# Altium PCB PCB1.PcbDoc
Units mm, origin at the board's own origin, x right, y up, seen from the top; angles counter-clockwise.
Board outline 55.12 x 28 mm, 2 copper layers (Top Layer, Bottom Layer); 10 components, 22 nets, 64 pads, 18 vias.
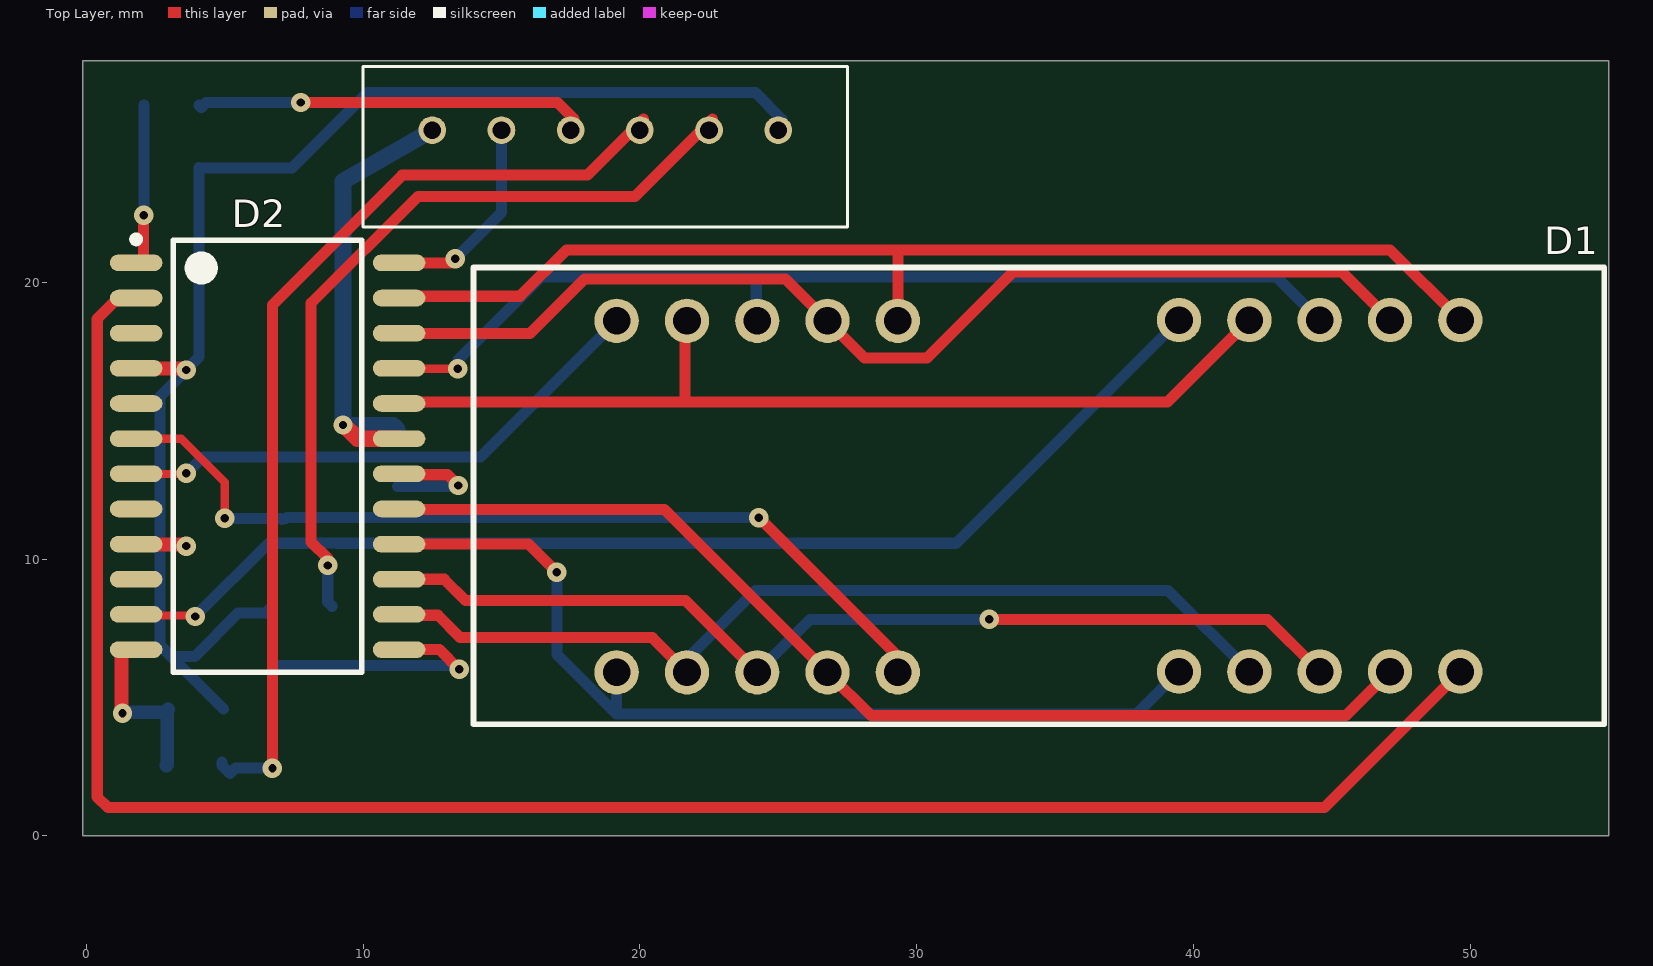
[diagram p0: Top Layer view]
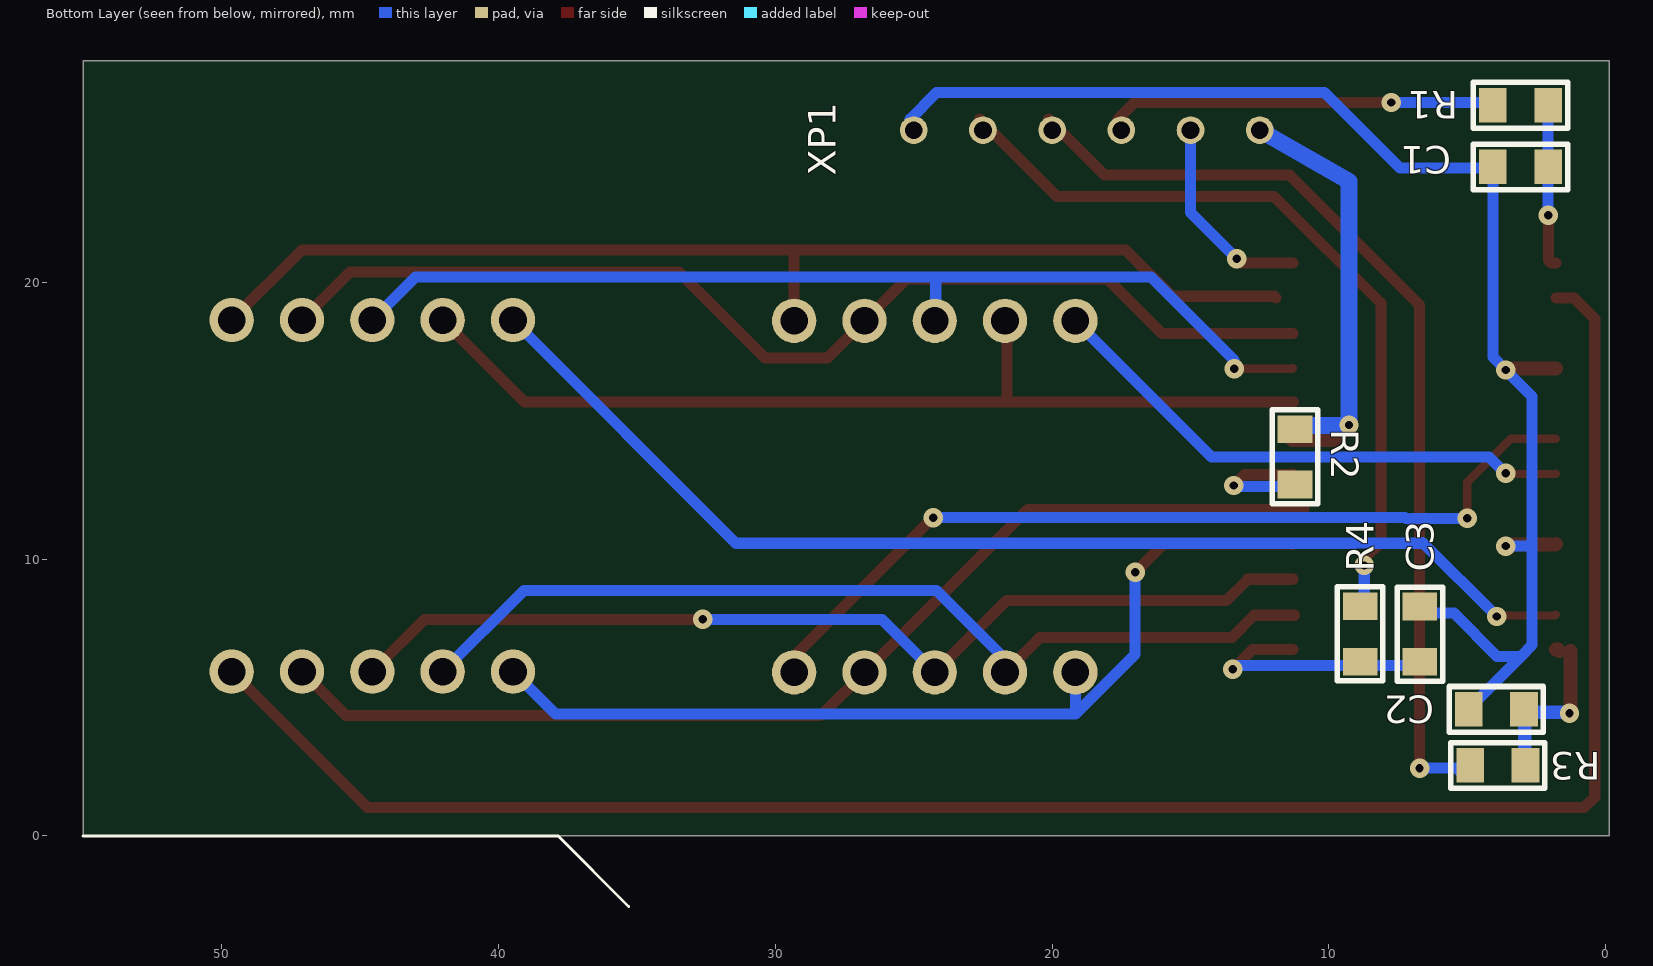
[diagram p1: Bottom Layer view, seen from below]
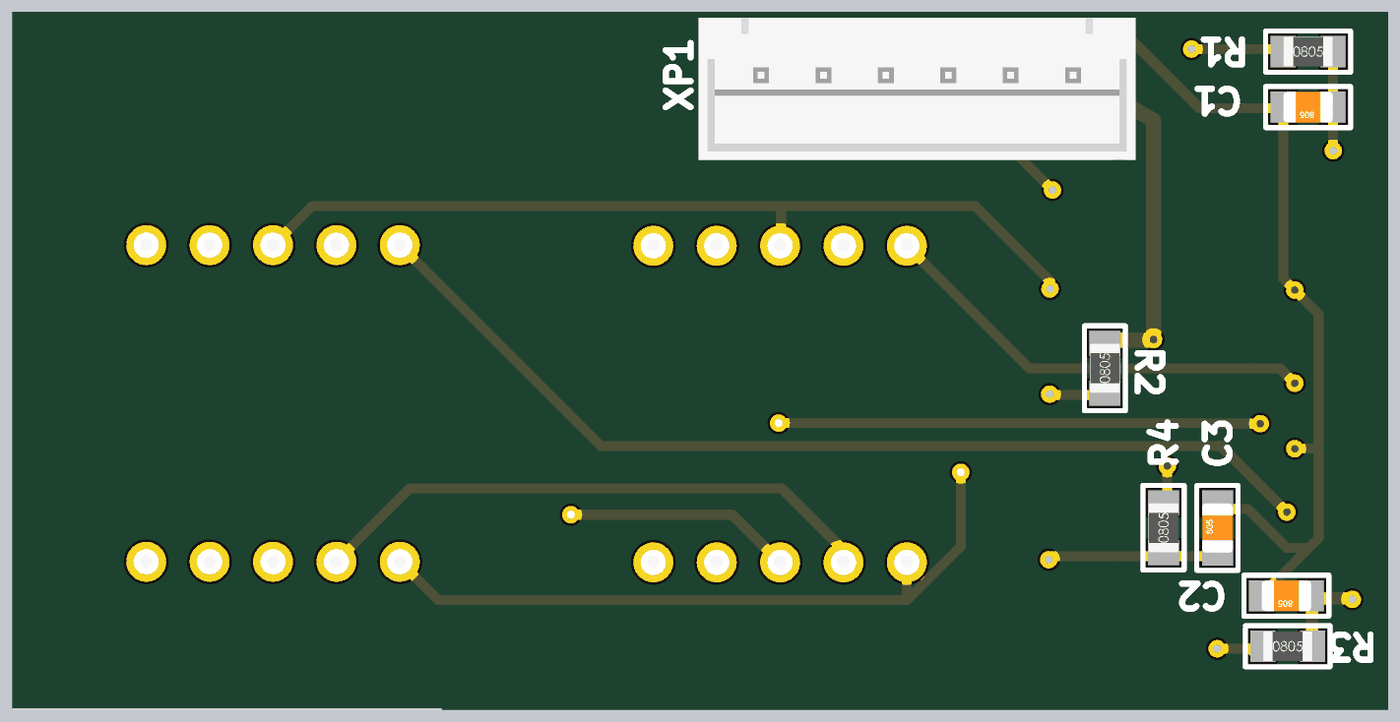
[diagram p2: 3D render of the assembled board from below, using the file's embedded part models]

## Layer stack, top to bottom
Top Solder: solder mask 0.0102, Solder Resist, Dk 3.5
Top Layer: signal copper 0.0356
Dielectric 1: dielectric 0.32, FR-4, Dk 4.8
Bottom Layer: signal copper 0.0356
Bottom Solder: solder mask 0.0102, Solder Resist, Dk 3.5

## Board outline
-0.12,0 55,0 55,28 -0.12,28

## Design rules (kind name [scope] priority, off if disabled: settings)
Clearance [All] p1: gap=0.254 ignorepadtopadclearanceinfootprint=FALSE except(0: Arc-Hole Track-Hole SMDPad-Hole THPad-Hole Via-Hole Fill-Hole Poly-Hole Region-Hole Text-Hole)
PolygonConnect [All] p1: connectstyle=Relief reliefconductorwidth=0.254 reliefentries=4 polygonreliefangle="90 Angle" airgapwidth=0.254
RoutingVias [All] p1: holewidth=0.711 width=1.27 viastyle="Through Hole" minholewidth=0.711 minwidth=1.27 maxholewidth=0.711 maxwidth=1.27
SolderMaskExpansion [All] p1: expansion=0.102
Width [All] p1: maxlimit=2 minlimit=0.2 preferedwidth=0.3 minimp=50.000000 maximp=50.000000 favimp=50.000000
30 further rules are at their usual default settings.

## Components (designator, comment, footprint, x,y, rotation, side; value= is the part's Value field where it differs from the comment)
C1 "Ceramic capacitor, 330pF, X7R, , , 0805," "CAP: 0805" 3.08,24.174 r0 bottom value=330pF
C2 "Ceramic capacitor, 330pF, X7R, , , 0805," "CAP: 0805" 3.95,4.575 r0 bottom value=330pF
C3 "Ceramic capacitor, 330pF, X7R, , , 0805," "CAP: 0805" 6.714,7.293 r90 bottom value=330pF
D1 "CC04-41CGKWA" "7 segment x4" 34.4,12.275 r180 top
D2 "MAX7219" SOIC127P1030X265-24N 6.55,13.72 r0 top
R1 ", 100R, , 0805, ," "RES: 0805" 3.08,26.4 r180 bottom value=100R
R2 ", 10K, , 0805, ," "RES: 0805" 11.225,13.7 r90 bottom value=10K
R3 "=ValueManufacturerPartNumber" "RES: 0805" 3.9,2.55 r180 bottom value=100R
R4 ", 100R, , 0805, ," "RES: 0805" 8.875,7.3 r90 bottom value=100R
XP1 "pw 10-6-M-R 5V" "PW 10-6-M" 12.5,25.5 r0 bottom

## Footprints (in the part's own frame and the unit in brackets; to place one, negate y for a bottom-side part, rotate by r counter-clockwise, add the part's x,y. Pads: shape width x height; smd on the part's side, far side on the other; paste and mask are expansions set on the pad)
"7 segment x4" [mm]
  round 1.6 hole 1: 1(-15.24,-6.362) 2(-12.7,-6.362) 3(-10.16,-6.362) 4(-7.62,-6.362) 5(-5.08,-6.362) 6(5.08,-6.337) 7(7.62,-6.337) 8(10.16,-6.337) 9(12.7,-6.337) 10(15.24,-6.337) 11(15.24,6.363) 12(12.7,6.363) 13(10.16,6.363) 14(7.62,6.363) 15(5.08,6.363) 16(-5.08,6.338) 17(-7.62,6.338) 18(-10.16,6.338) 19(-12.7,6.338) 20(-15.24,6.338)
  silkscreen extent -20.44,-8.26 20.41,8.24, body extent -20.2,-8.01 20.2,7.99, height 8
"CAP: 0805" [mm]
  rect 1x1.25 smd: 1(-1,0) 2(1,0)
  silkscreen extent -1.7,-0.82 1.7,0.82, body extent -1,-0.62 1,0.63, height 0.78
"PW 10-6-M" [mm]
  round 1 hole 0.64: 1(0,0) 2(2.5,0) 3(5,0) 4(7.5,0) 5(10,0) 6(12.5,0)
  body extent -2.5,-2.25 15,3.45, height 8
"RES: 0805" [mm]
  rect 1x1.25 smd: 1(-1,0) 2(1,0)
  silkscreen extent -1.7,-0.82 1.7,0.82, body extent -1,-0.6 1,0.6, height 0.44
SOIC127P1030X265-24N [mm] "SOIC, 24-Leads, Body 15,40x7,50mm, Pitch 1,27mm, IPC Medium Density"
  oval 1.9x0.6 smd: 1(-4.75,6.985) 2(-4.75,5.715) 3(-4.75,4.445) 4(-4.75,3.175) 5(-4.75,1.905) 6(-4.75,0.635) 7(-4.75,-0.635) 8(-4.75,-1.905) 9(-4.75,-3.175) 10(-4.75,-4.445) 11(-4.75,-5.715) 12(-4.75,-6.985) 13(4.75,-6.985) 14(4.75,-5.715) 15(4.75,-4.445) 16(4.75,-3.175) 17(4.75,-1.905) 18(4.75,-0.635) 19(4.75,0.635) 20(4.75,1.905) 21(4.75,3.175) 22(4.75,4.445) 23(4.75,5.715) 24(4.75,6.985)
  silkscreen extent -4.87,-7.8 3.4,7.96, body extent -5.16,-7.8 5.16,7.8, height 2.65

## Part data
C1 C2 C3: library part Ceramic_0805, Package=0805, TypeCapacitor="Ceramic capacitor", TypeDielectric=X7R, ValueManufacturerPartNumber="Ceramic capacitor, 330pF, X7R, , , 0805,"
D1: library part LED_7x4, Manufacture=KingBright, HelpURL=https://www.chipdip.ru/product1/8001938892
R1 R2 R3 R4: library part Resistor_0805, Package=0805
  R1 R4: ValueManufacturerPartNumber=", 100R, , 0805, ,"
  R2: ValueManufacturerPartNumber=", 10K, , 0805, ,"

## Via types
v1: diameter 0.7, hole 0.3, Top Layer to Bottom Layer, 18 vias

## Nets (pads, with @x,y where several pads share a name; then routed paths per layer and width w, separated by ;. In a path a pad name is that pad's centre, name@x,y a point inside that pad or via, vN(x,y) a via of type N, cw(c..) or ccw(c..) an arc to the next point about the centre after c; other vN are vias at no path point)
+5: D2.19 R2.2 XP1.1 | length 16.7
  Top Layer w0.6: v1(9.275,14.85) 9.302,14.85 9.797,14.355 D2.19
  Bottom Layer w0.6: R2.2 11.094,14.831 9.294,14.831 v1(9.275,14.85) 9.275,23.647 12.253,25.358 XP1.1@12.306,25.552
A: D1.12 D1.17 D2.14 | length 34.5
  Top Layer w0.4: D2.14@11.25,7.975 12.7,7.975 13.509,7.166 20.446,7.166 21.662,5.95 21.7,5.95 D1.12
  Bottom Layer w0.4: D1.12@21.7,5.825 D1.12 21.7,6.401 24.174,8.875 39.082,8.875 D1.17
B: D1.11 D1.16 D2.16 | length 34.6
  Top Layer w0.4: D2.16@11.31,10.535 D2.16 15.98,10.545 v1(17,9.525)
  Bottom Layer w0.4: v1(17,9.525) 17,6.56 19.16,4.4 ; D1.11 19.16,4.4 ; D1.16 37.943,4.4 19.16,4.4
C: D1.4 D1.9 D2.20 | length 35.5
  Top Layer w0.4: D2.20@11.275,15.675 21.625,15.675 ; D1.9 21.7,18.725 21.65,18.775 21.625,18.75 21.625,15.675 ; D1.4 42.02,18.405 42.05,18.375 41.758,18.375 39.058,15.675 21.625,15.675
CLK: R4.2 XP1.5 | length 28.5
  Top Layer w0.4: v1(8.725,9.775) 8.725,10.025 8.125,10.625 8.125,19.246 11.979,23.1 19.825,23.1 XP1.5@22.625,25.9
  Bottom Layer w0.4: v1(8.725,9.775) 8.725,8.45 R4.2
CS: R3.1 XP1.4 | length 35.1
  Top Layer w0.4: v1(6.725,2.45) 6.725,19.175 11.412,23.862 ; 11.412,23.875 18.1,23.875 XP1.4@20.125,25.9
  Bottom Layer w0.4: R3.1@4.9,2.675 R3.1 5.2,2.25 5.4,2.45 v1(6.725,2.45)
D: D1.1 D1.6 D2.23 | length 42.2
  Top Layer w0.4: D2.23@11.91,19.435 11.975,19.5 15.675,19.5 17.35,21.175 47.102,21.175 D1.1 ; D1.6@29.154,18.779 D1.6 29.32,21.1
Dig1: D1.20 D2.2 | length 70.4
  Top Layer w0.4: D2.2 1.15,19.435 0.396,18.681 0.396,1.413 0.784,1.025 44.728,1.025 D1.20
Dig2: D1.5 D2.11 | length 42.2
  Top Layer w0.3: D2.11 1.838,7.967 3.896,7.967 v1(3.934,7.929)
  Bottom Layer w0.4: v1(3.934,7.929) 6.613,10.608 ; 6.646,10.575 8.388,10.575 8.392,10.579 9.058,10.579 9.062,10.575 31.418,10.575 39.45,18.607 39.45,18.675 39.48,18.645 D1.5
Dig3: D1.15 D2.6 | length 32
  Top Layer w0.3: D2.6 3.427,14.355 5,12.782 v1(5,11.475) ; D1.15 D1.15@29.338,6.462
  Top Layer w0.4: v1(24.3,11.5) D1.15@29.338,6.462
  Bottom Layer w0.4: v1(5,11.475) 7.025,11.475 7.073,11.427 ; 7.223,11.477 7.246,11.5 v1(24.3,11.5)
Dig4: D1.10 D2.7 | length 19.6
  Top Layer w0.3: D2.7 1.805,13.08 3.596,13.08 v1(3.616,13.1)
  Bottom Layer w0.4: v1(3.616,13.1) 4.215,13.699 14.225,13.699 ; 14.248,13.7 D1.10
DP: D1.2 D1.7 D2.22 | length 39.9
  Top Layer w0.4: D2.22@11.3,18.15 16.025,18.15 18,20.125 25.267,20.125 26.767,18.625 26.8,18.625 26.787,18.612 D1.7 28.117,17.275 30.375,17.275 33.475,20.375 45.362,20.375 46.95,18.788 46.95,18.725 47.037,18.637 D1.2
E: D1.3 D1.8 D2.21 | length 37.2
  Top Layer w0.3: D2.21 11.31,16.885 13.24,16.885 13.325,16.8 13.4,16.875 v1(13.425,16.875)
  Bottom Layer w0.4: v1(13.425,16.875) 13.425,17.2 16.425,20.2 42.997,20.2 44.522,18.675 44.625,18.675 44.587,18.637 D1.3 ; 24.204,20.035 D1.8@24.204,18.675 ; D1.8 24.24,18.665 24.25,18.675 D1.8@24.204,18.675 ; D1.8@24.204,18.675 24.204,18.648 24.177,18.675 D1.8@24.204,18.675
F: D1.13 D1.18 D2.15 | length 36.5
  Top Layer w0.4: D2.15 12.932,9.275 13.707,8.5 21.652,8.5 24.2,5.952 24.2,5.95 24.238,5.912 D1.13 ; v1(32.625,7.825) 42.672,7.825 44.4,6.098 44.4,6.025 44.487,5.937 D1.18
  Bottom Layer w0.4: D1.13 24.24,5.935 24.15,6.025 24.353,6.025 26.153,7.825 v1(32.625,7.825)
G: D1.14 D1.19 D2.17 | length 39.9
  Top Layer w0.4: D2.17@10.9,11.8 20.892,11.8 D1.14 28.342,4.35 45.513,4.35 D1.19
GND: C1.2 C2.2 C3.2 D2.4 D2.9 XP1.6 | length 52.5
  Top Layer w0.5: D2.9 1.81,10.535 3.5,10.535 3.562,10.473 v1(3.616,10.473) ; D2.4 3.5,16.895 3.562,16.833 v1(3.616,16.833)
  Bottom Layer w0.4: v1(3.616,10.473) 2.662,10.473 ; C1.2@4.08,24.15 4.08,17.297 v1(3.616,16.833) 2.662,15.879 2.662,10.473 ; C1.2@4.25,24.125 7.425,24.125 10.154,26.854 24.171,26.854 XP1.6@25.125,25.9 ; C2.2@4.965,4.59 3.065,6.49 ; C3.2 6.475,8.054 5.489,8.054 3.925,6.49 3.065,6.49 ; 2.662,10.473 2.662,6.893 3.065,6.49
MISO: D2.24 XP1.2 | length 7.4
  Top Layer w0.4: D2.24 13.18,20.705 v1(13.325,20.85)
  Bottom Layer w0.4: v1(13.325,20.85) 15,22.525 15,22.775 XP1.2
MOSI: R1.1 XP1.3 | length 13.9
  Top Layer w0.4: v1(7.75,26.5) 17.025,26.5 XP1.3@17.625,25.9
  Bottom Layer w0.4: R1.1 4.155,26.325 4.33,26.5 v1(7.75,26.5)
NetC1_1: C1.1 D2.1 R1.2 | length 5.9
  Top Layer w0.4: D2.1 1.983,20.705 2.075,20.797 v1(2.075,22.425)
  Bottom Layer w0.4: v1(2.075,22.425) 2.08,22.43 C1.1 R1.2
NetC2_1: C2.1 D2.12 R3.2 | length 6
  Top Layer w0.5: v1@1.275,4.575 D2.12@1.275,6.689 ; D2.12@1.675,6.689 1.721,6.735 D2.12
  Bottom Layer w0.5: v1(1.308,4.431) 1.346,4.469 2.844,4.469 C2.1@2.925,4.55 ; R3.2 2.925,2.575 C2.1@2.925,4.55 ; C2.1 C2.1@2.925,4.55
NetC3_1: C3.1 D2.13 R4.1 | length 9.2
  Top Layer w0.4: D2.13 12.76,6.735 v1(13.474,6.021)
  Bottom Layer w0.4: C3.1@6.778,6.164 13.331,6.164 v1(13.474,6.021)
NetD2_18: D2.18 R2.1 | length 4.5
  Top Layer w0.4: D2.18 11.334,13.051 13.048,13.051 v1(13.437,12.662)
  Bottom Layer w0.4: R2.1@11.248,12.625 13.4,12.625 v1(13.437,12.662)
pads on no net: D2.3 D2.5 D2.8 D2.10

## Silkscreen, mask and mechanical layers (free items; w line width, h text height)
Bottom Overlay:
  lines w0.1: 35.298,-2.544 37.842,0 55.014,0
Drill Drawing:
  the board outline again, w0.2

## Dimensions
55,0 to 55,28 on Top Layer
54.875,0 to -0.12,0 on Top Layer